# Allegro board GatawayAndControl.brd
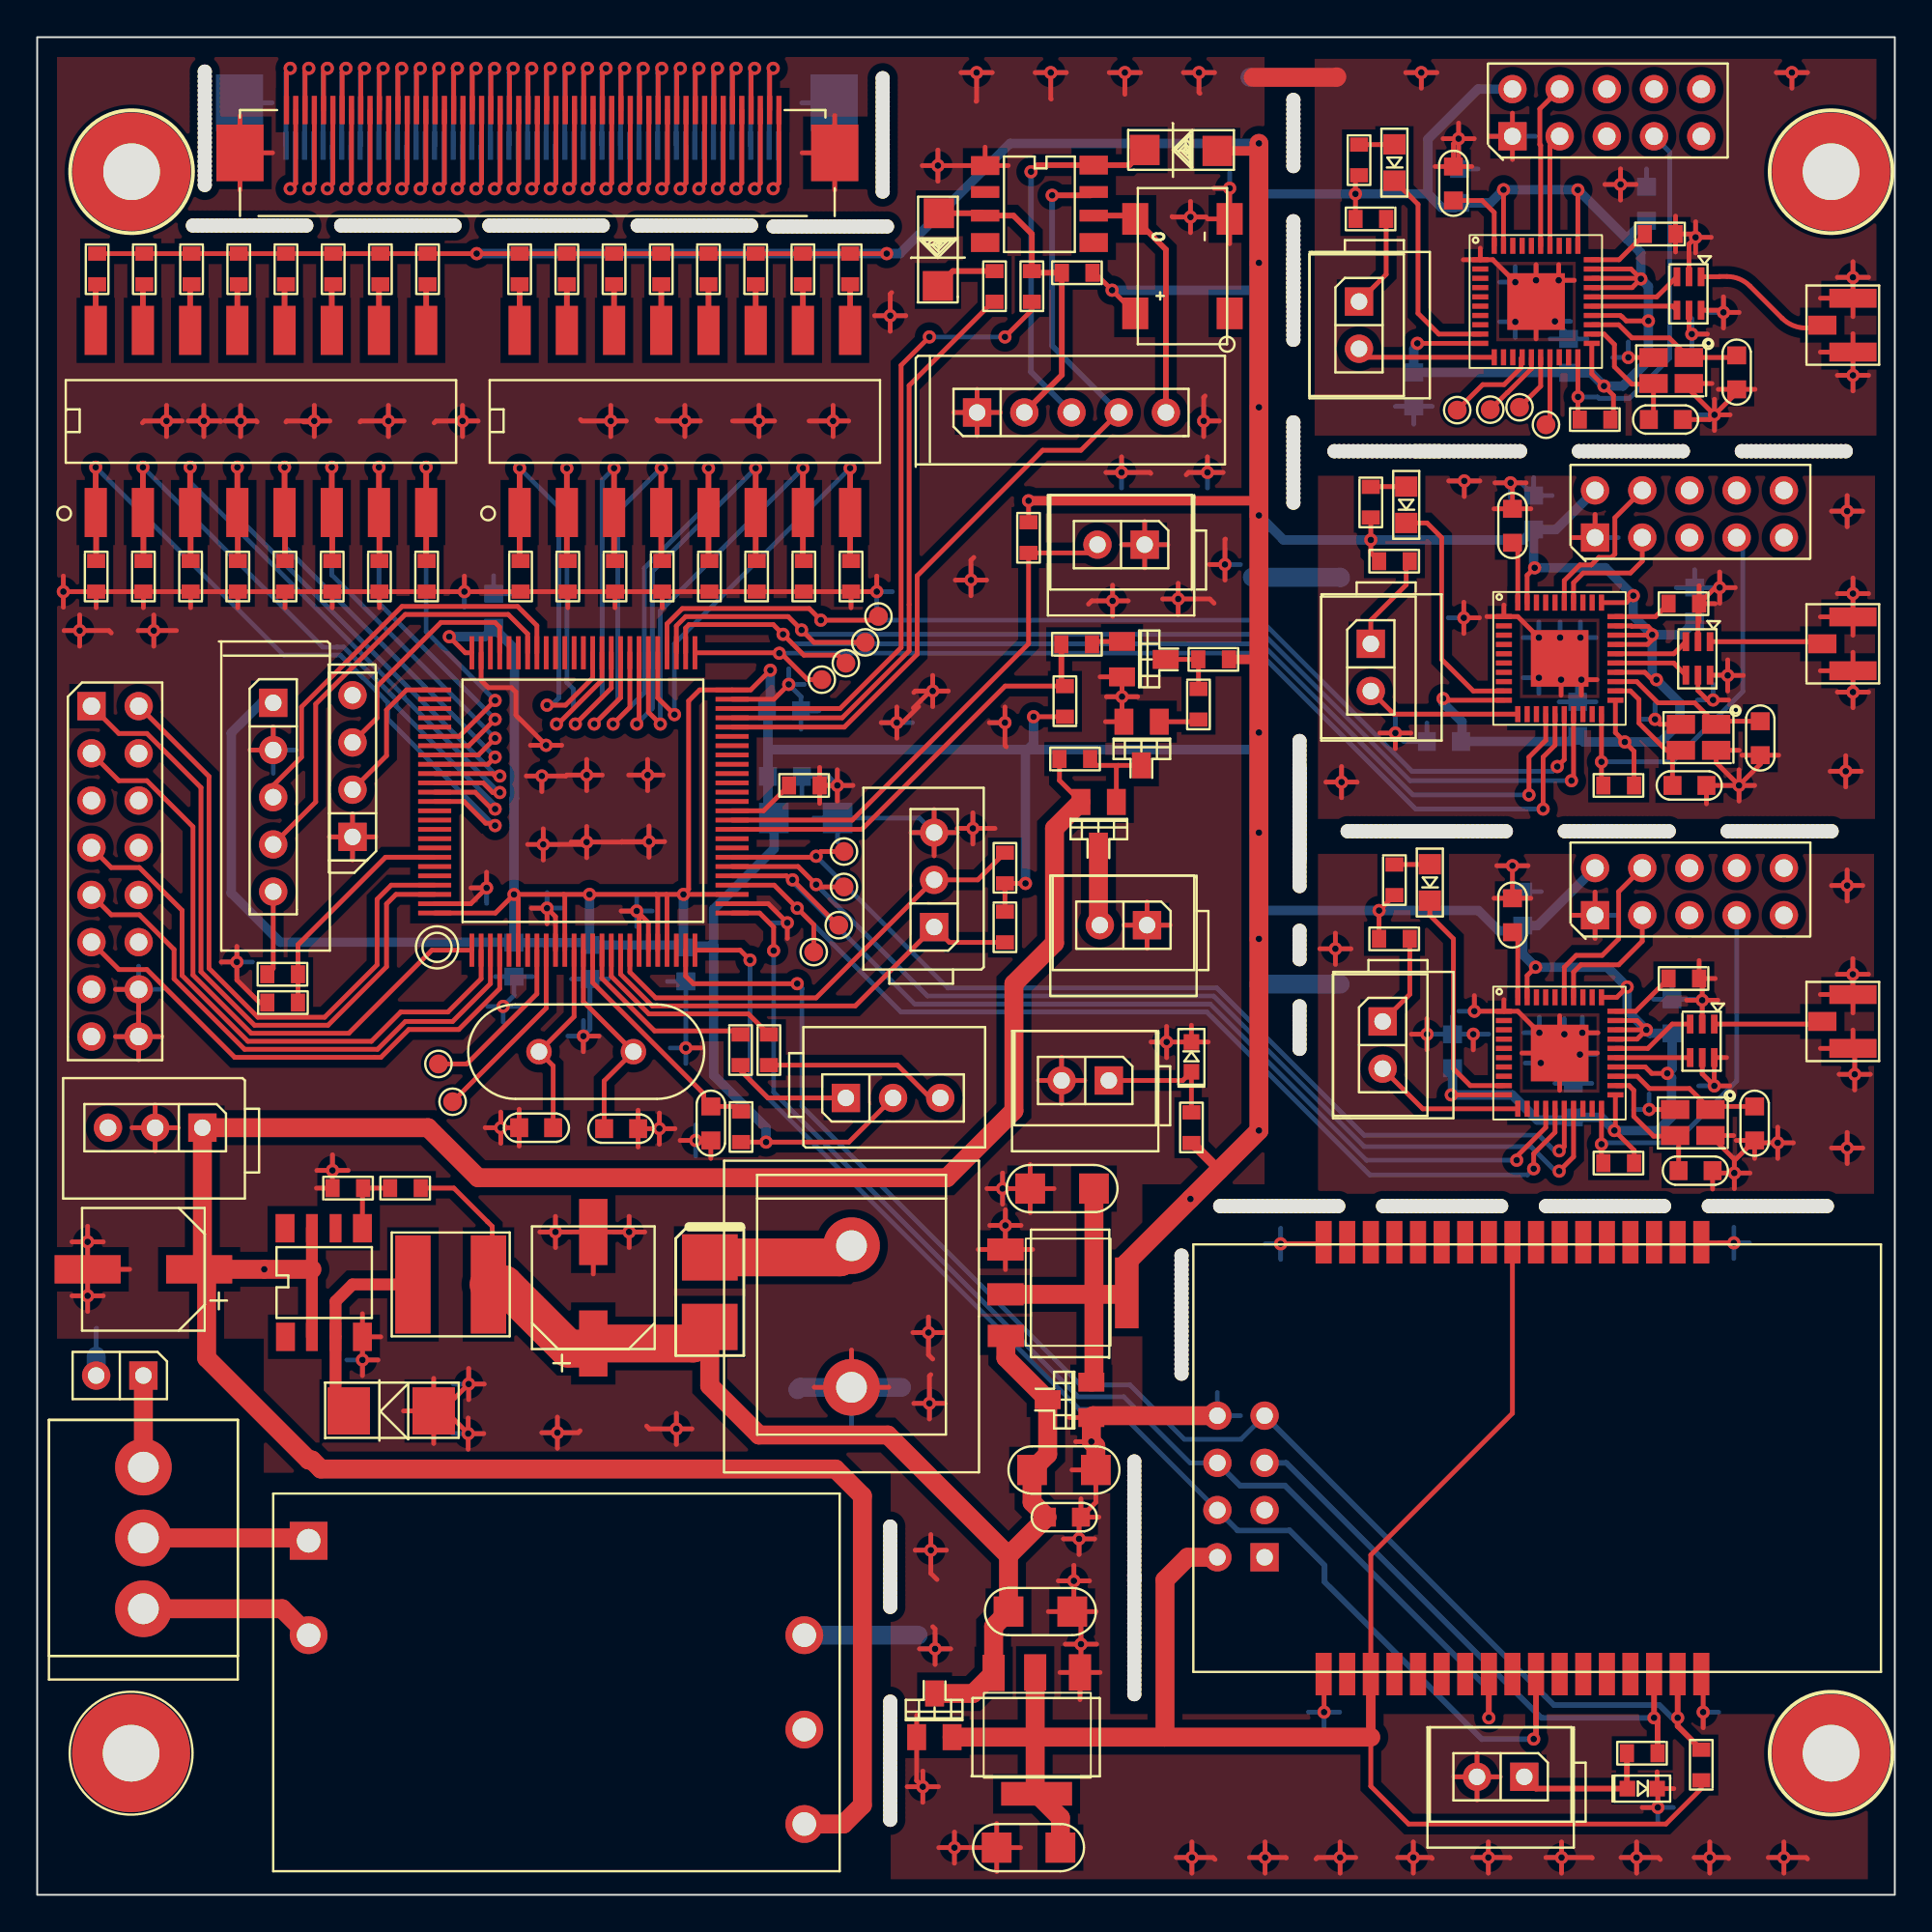
[diagram p0: board, top side]
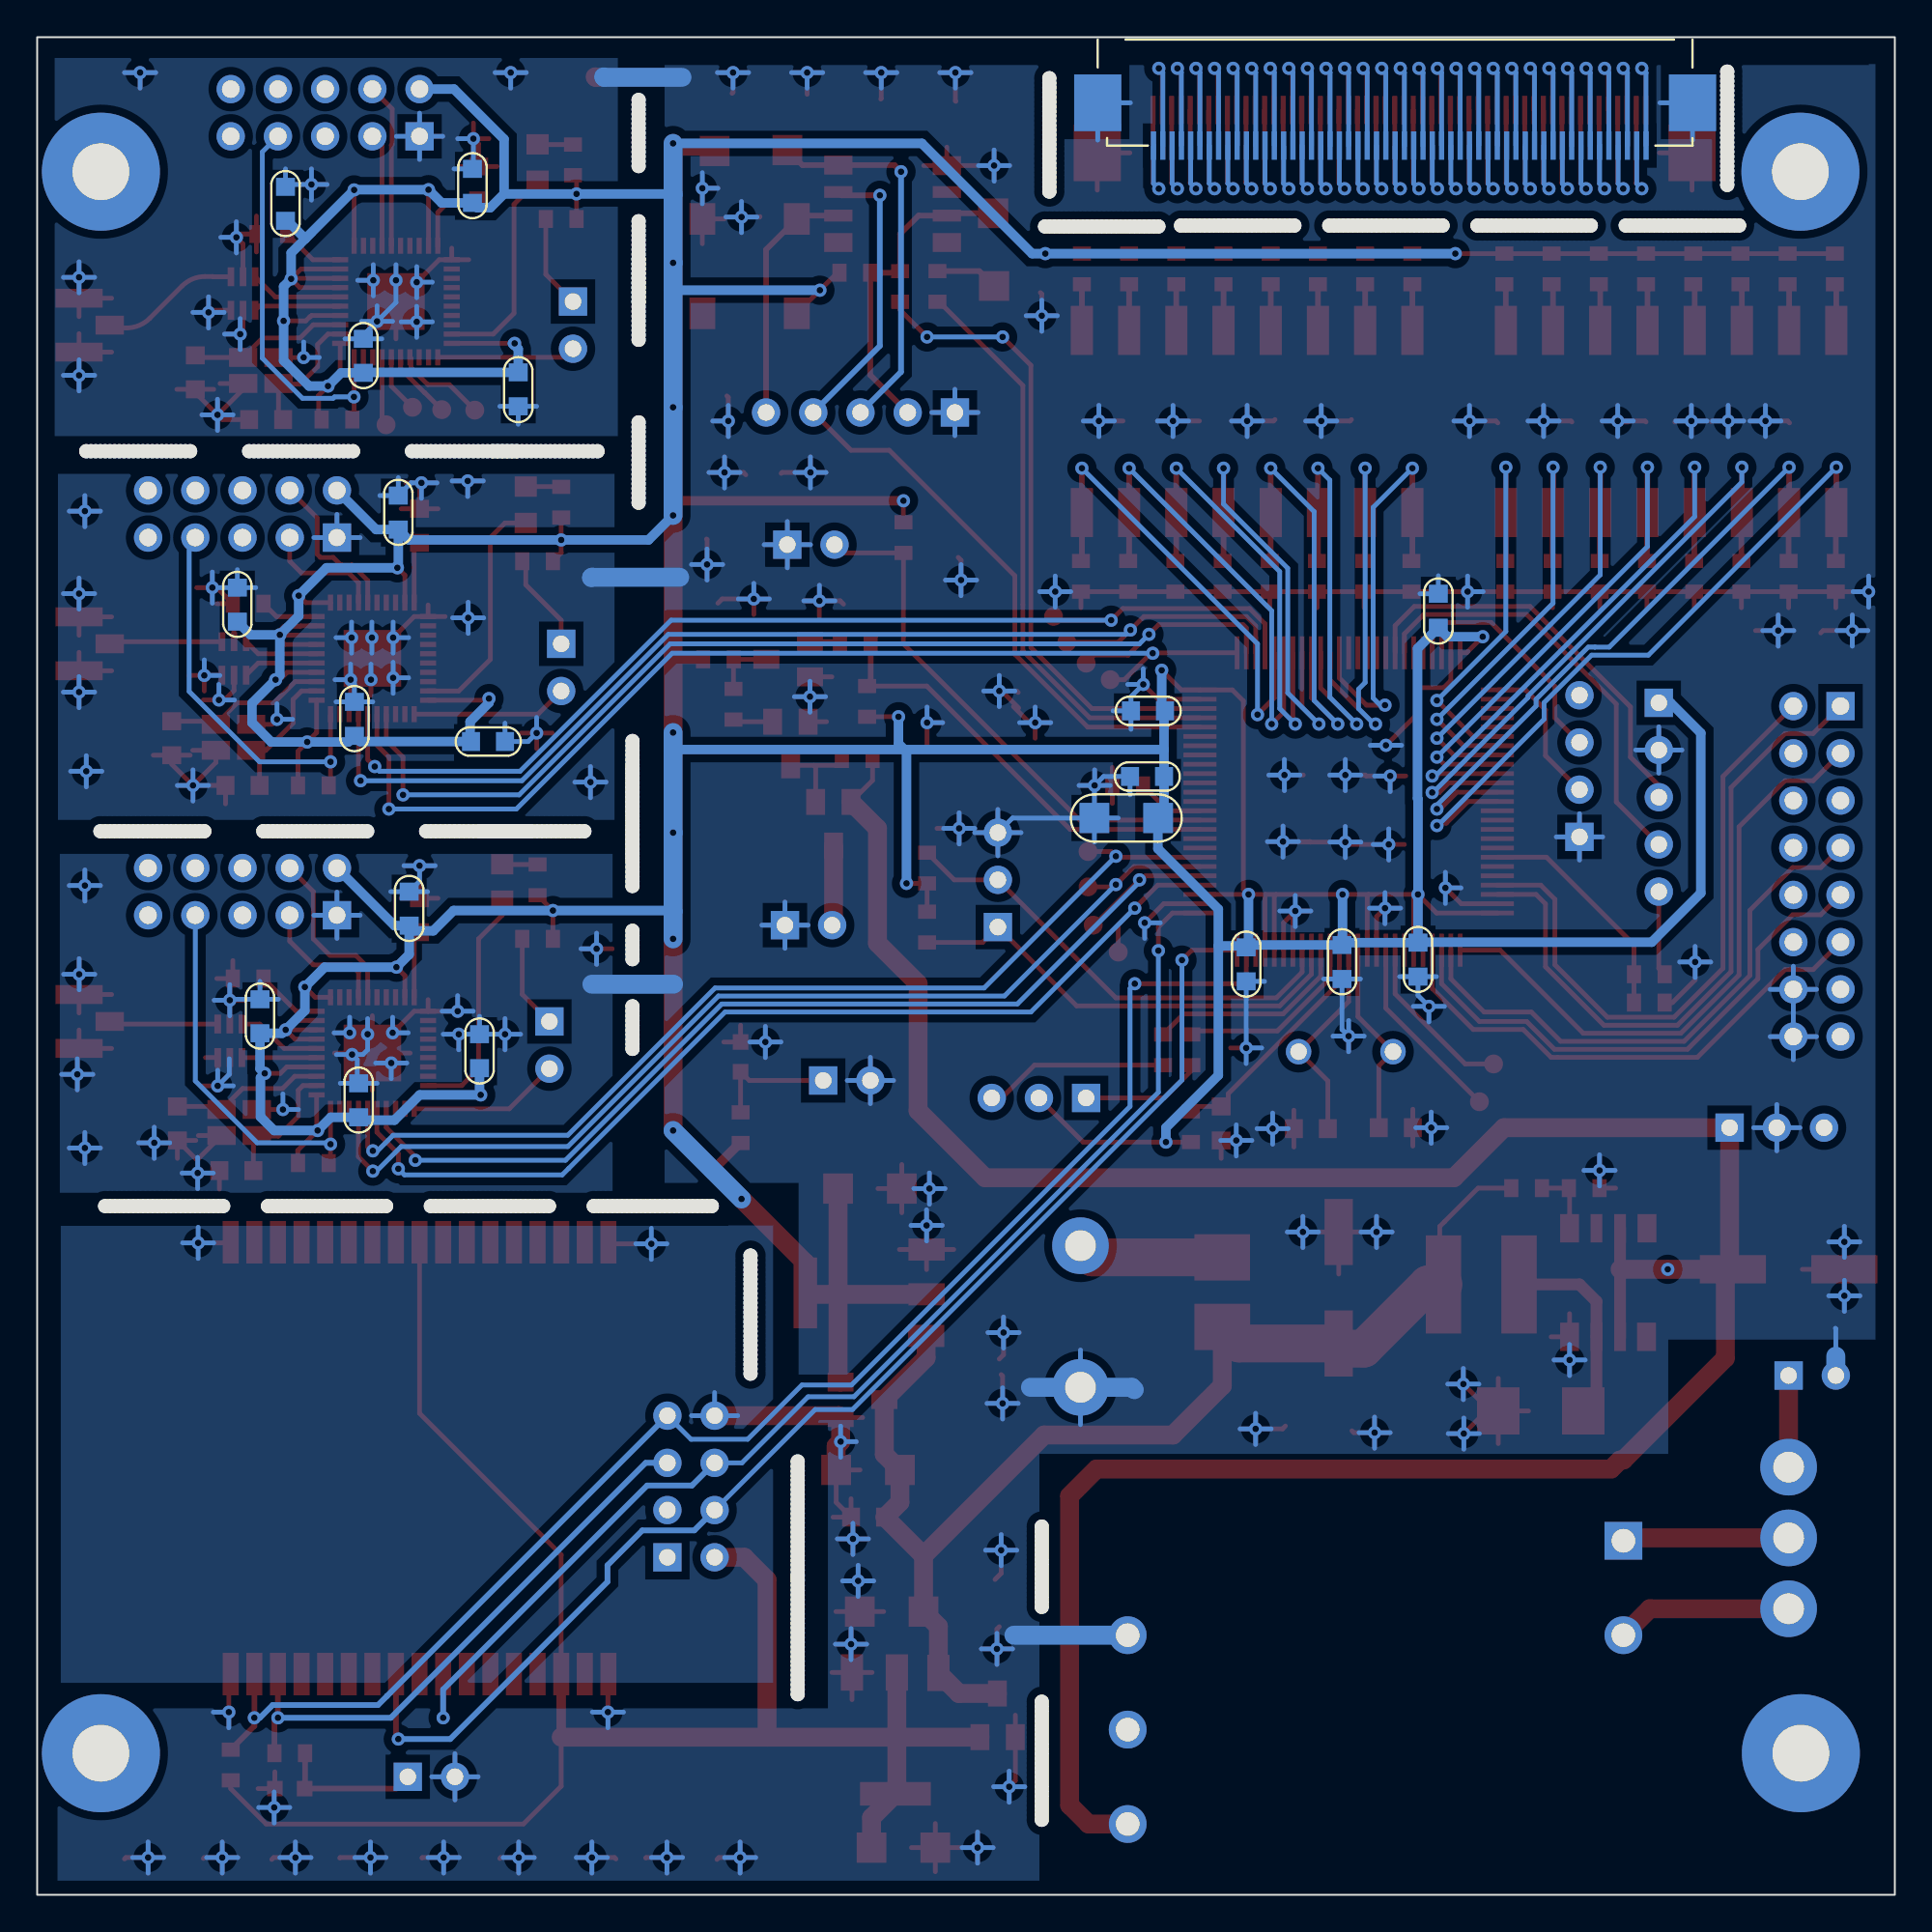
[diagram p1: board, bottom side, seen from below]

Outline 99.95 x 99.95 mm; copper layers: TOP, BOTTOM. Coordinates in mm from the lower left corner of the outline.
Outline path: rectangle 0,0 99.95,99.95

## Placement (name value [footprint] x y rotation side)
AC_220V  AC_220V  [HEADER3-150MIL]  5.71 19.2 180 top
ANT201  -  [IPX]  94.61 46.99 90 top
ANT301  -  [IPX]  94.61 67.31 90 top
ANT401  -  [IPX]  94.61 84.45 90 top
BM200  -  [2450BM]  89.59 45.95 0 top
BM300  -  [2450BM]  89.36 66.52 0 top
BM400  -  [2450BM]  88.87 86.16 0 top
C100  0.1U  [C0603]  36.25 41.5 270 top
C101  0.1U  [C0603]  25.65 50.32 270 bottom
C102  0.1U  [C0603]  29.74 50.19 270 bottom
C103  0.1U  [C0603]  40.23 60.17 0 bottom
C104  0.1U  [C0603]  40.18 63.7 0 bottom
C105  0.1U  [C0603]  24.56 69.09 90 bottom
C106  10uF  [C1206]  41.35 57.94 270 bottom
C107  0.1U  [C0603]  34.9 50.06 270 bottom
C108  15pF  [C0603]  26.85 41.27 180 top
C109  15pF  [C0603]  31.42 41.22 0 top
C200  1uf  [C0603]  79.38 52.7 270 top
C202  0.1uf  [C0603]  76.15 45.39 270 bottom
C203  0.1uf  [C0603]  82.65 42.75 270 bottom
C204  0.1uf  [C0603]  87.96 47.27 270 bottom
C205  0.1uf  [C0603]  79.93 53.06 270 bottom
C208  20pF  [C0603]  89.23 38.96 0 top
C209  20pF  [C0603]  92.41 41.5 270 top
C300  1uf  [C0603]  79.38 73.66 270 top
C301  0.1uf  [C0603]  75.69 62.05 0 bottom
C303  0.1uf  [C0603]  82.88 63.27 270 bottom
C304  0.1uf  [C0603]  89.18 69.42 270 bottom
C305  0.1uf  [C0603]  80.52 74.37 270 bottom
C308  20pF  [C0603]  88.9 59.69 0 top
C309  20pF  [C0603]  92.71 62.23 270 top
C400  1uf  [C0603]  76.2 92.08 270 top
C401  0.1uf  [C0603]  74.07 81 90 bottom
C402  0.1uf  [C0603]  82.4 82.8 270 bottom
C403  0.1uf  [C0603]  86.59 90.98 270 bottom
C404  0.1uf  [C0603]  76.53 91.95 270 bottom
C408  20pF  [C0603]  87.63 79.38 0 top
C409  20pF  [C0603]  91.44 81.92 270 top
C500  10uF  [C1206]  53.98 15.24 90 top
C501  10uF  [C1206]  53.34 2.54 270 top
C1000  220uf/25v  [CAPAE660X570L]  5.71 33.66 180 top
C1001  100uf/ECAP6  [CAPAE660X570L]  29.92 32.66 90 top
C1002  0.1uf  [C0603]  55.24 20.32 180 top
C1003  10uF  [C1206]  55.24 22.86 90 top
C1004  10uF  [C1206]  55.14 38 270 top
C1005  CAP_1  [HEADER2]  5.71 27.94 180 top
D900  DIODE  [1N4148]  59.99 93.85 90 top
D901  DIODE  [1N4148]  48.49 86.97 180 top
D1000  1N5819  [B130L]  19.05 26.04 0 top
D1001  LED  [LED0603]  86.36 5.71 270 top
D1002  LED  [LED0603]  62.1 45.09 0 top
DC_12V  DC_12V  [HEADER3]  5.08 41.27 180 top
DOWN200  DOWN  [HEADER10]  83.82 52.7 0 top
DOWN300  DOWN  [HEADER10]  83.82 73.03 0 top
DOWN400  DOWN  [HEADER10]  79.38 94.61 0 top
H600  LED_POWER  [HEADER2-300MIL]  43.81 31.11 0 top
H601  LED_12PORT  [HEADER8X2]  2.92 63.96 270 top
H700  HEADER  [HEADER2]  59.72 52.17 180 top
H701  HEADER  [HEADER2]  59.59 72.64 180 top
H900  DOWNLOAD  [HEADER5]  50.57 79.76 0 top
H*  -  [unnamed#2]  96.52 7.62 0 top
H*#2  -  [unnamed#2]  5.08 92.71 0 top
H*#3  -  [unnamed#2]  5.05 7.62 0 top
ID800  ID1  [SW-8PIN]  12.04 79.27 90 top
ID801  ID2  [SW-8PIN]  34.85 79.27 90 top
J600  JUMP  [CAP-B]  36.2 32.38 90 top
J601  FPC54  [FH12A-54S-0_5FCC]  13.41 93.73 0 top
J602  FPC54  [FH12A-54S-0_5FCC]  13.39 96.42 0 bottom
J603  TESTPONT-L  [TESTSMD]  76.4 79.88 0 top
J604  TESTPONT-L  [TESTSMD]  78.18 79.91 0 top
J605  TESTPONT-L  [TESTSMD]  79.76 80.04 0 top
J606  TESTPONT-L  [TESTSMD]  81.18 79.1 0 top
J607  TESTPONT-L  [TESTSMD]  43.13 52.17 0 top
J608  TESTPONT-L  [TESTSMD]  41.78 50.72 0 top
J609  TESTPONT-L  [TESTSMD]  43.41 56.13 0 top
J610  TESTPONT-L  [TESTSMD]  43.41 54.23 0 top
J611  TESTPONT-L  [TESTSMD]  42.21 65.38 0 top
J612  TESTPONT-L  [TESTSMD]  45.26 68.78 0 top
J613  TESTPONT-L  [TESTSMD]  43.51 66.27 0 top
J614  TESTPONT-L  [TESTSMD]  44.55 67.39 0 top
L1000  22UH/SMD  [CDRH4D18]  22.25 32.84 270 top
LED100  LED  [HEADER3]  47.32 42.88 0 top
LED200  LED  [LED_SMD]  74.93 53.34 180 top
LED300  LED  [LED_SMD]  73.66 73.66 180 top
LED400  LED  [LED_SMD]  73.03 92.08 180 top
NOREF  -  [unnamed]  61.57 34.39 270 top
NOREF#2  -  [unnamed]  45.49 97.23 270 top
NOREF#3  -  [unnamed]  67.59 87.76 90 top
NOREF#4  -  [unnamed]  37.13 89.81 180 top
NOREF#5  -  [unnamed]  72.59 77.67 0 top
NOREF#6  -  [unnamed]  67.92 60.55 270 top
NOREF#7  -  [unnamed]  75.84 57.23 0 top
NOREF#8  -  [unnamed]  76.73 37.06 180 top
NOREF#9  -  [unnamed]  67.59 76.43 90 top
NOREF#10  -  [unnamed]  85.5 77.67 0 top
NOREF#11  -  [unnamed]  78.26 77.67 0 top
NOREF#12  -  [unnamed]  72.8 57.23 0 top
NOREF#13  -  [unnamed]  83.97 37.06 180 top
NOREF#14  -  [unnamed]  70.31 77.67 0 top
NOREF#15  -  [unnamed]  67.59 94.79 90 top
NOREF#16  -  [unnamed]  67.92 47.04 270 top
NOREF#17  -  [unnamed]  9.14 89.81 180 top
NOREF#18  -  [unnamed]  19.91 89.81 180 top
NOREF#19  -  [unnamed]  69.24 37.06 180 top
NOREF#20  -  [unnamed]  67.59 88.27 90 top
NOREF#21  -  [unnamed]  9.02 96.06 270 top
NOREF#22  -  [unnamed]  61.57 34.14 270 top
NOREF#23  -  [unnamed]  27.38 89.81 180 top
NOREF#24  -  [unnamed]  67.59 87 90 top
NOREF#25  -  [unnamed]  67.92 54.53 270 top
NOREF#26  -  [unnamed]  59.03 17.98 270 top
NOREF#27  -  [unnamed]  95.02 57.23 0 top
NOREF#28  -  [unnamed]  74.07 57.23 0 top
NOREF#29  -  [unnamed]  68.22 37.06 180 top
NOREF#30  -  [unnamed]  59.03 20.27 270 top
NOREF#31  -  [unnamed]  61.57 31.34 270 top
NOREF#32  -  [unnamed]  91.97 37.06 180 top
NOREF#33  -  [unnamed]  85.75 77.67 0 top
NOREF#34  -  [unnamed]  25.1 89.81 180 top
NOREF#35  -  [unnamed]  43.69 89.76 180 top
NOREF#36  -  [unnamed]  19.41 89.81 180 top
NOREF#37  -  [unnamed]  35.1 89.81 180 top
NOREF#38  -  [unnamed]  61.57 31.85 270 top
NOREF#39  -  [unnamed]  86 57.23 0 top
NOREF#40  -  [unnamed]  59.03 19.25 270 top
NOREF#41  -  [unnamed]  59.03 13.08 270 top
NOREF#42  -  [unnamed]  88.04 77.67 0 top
NOREF#43  -  [unnamed]  9.02 96.32 270 top
NOREF#44  -  [unnamed]  75.13 77.67 0 top
NOREF#45  -  [unnamed]  67.59 96.06 90 top
NOREF#46  -  [unnamed]  67.59 85.72 90 top
NOREF#47  -  [unnamed]  59.03 19 270 top
NOREF#48  -  [unnamed]  74.96 77.67 0 top
NOREF#49  -  [unnamed]  67.92 56.57 270 top
NOREF#50  -  [unnamed]  24.84 89.81 180 top
NOREF#51  -  [unnamed]  45.9 5.56 90 top
NOREF#52  -  [unnamed]  76.48 57.23 0 top
NOREF#53  -  [unnamed]  35.61 89.81 180 top
NOREF#54  -  [unnamed]  67.59 95.3 90 top
NOREF#55  -  [unnamed]  13.46 89.81 180 top
NOREF#56  -  [unnamed]  93.75 37.06 180 top
NOREF#57  -  [unnamed]  45.49 92.91 270 top
NOREF#58  -  [unnamed]  19.66 89.81 180 top
NOREF#59  -  [unnamed]  25.86 89.81 180 top
NOREF#60  -  [unnamed]  86.51 57.23 0 top
NOREF#61  -  [unnamed]  9.65 89.81 180 top
NOREF#62  -  [unnamed]  90.2 37.06 180 top
NOREF#63  -  [unnamed]  67.92 56.49 270 top
NOREF#64  -  [unnamed]  77.75 37.06 180 top
NOREF#65  -  [unnamed]  67.92 58.27 270 top
NOREF#66  -  [unnamed]  78.77 77.67 0 top
NOREF#67  -  [unnamed]  86 37.06 180 top
NOREF#68  -  [unnamed]  69.75 37.06 180 top
NOREF#69  -  [unnamed]  67.59 93.52 90 top
NOREF#70  -  [unnamed]  86.51 77.67 0 top
NOREF#71  -  [unnamed]  9.02 93.52 270 top
NOREF#72  -  [unnamed]  45.9 7.59 90 top
NOREF#73  -  [unnamed]  45.49 97.74 270 top
NOREF#74  -  [unnamed]  73.18 37.06 180 top
NOREF#75  -  [unnamed]  27.89 89.81 180 top
NOREF#76  -  [unnamed]  67.59 96.32 90 top
NOREF#77  -  [unnamed]  92.99 57.23 0 top
NOREF#78  -  [unnamed]  94.01 57.23 0 top
NOREF#79  -  [unnamed]  92.74 37.06 180 top
NOREF#80  -  [unnamed]  95.78 37.06 180 top
NOREF#81  -  [unnamed]  45.49 94.95 270 top
NOREF#82  -  [unnamed]  67.59 77.95 90 top
NOREF#83  -  [unnamed]  63.65 37.06 180 top
NOREF#84  -  [unnamed]  45.9 8.36 90 top
NOREF#85  -  [unnamed]  67.59 75.92 90 top
NOREF#86  -  [unnamed]  43.43 89.76 180 top
NOREF#87  -  [unnamed]  67.92 50.85 270 top
NOREF#88  -  [unnamed]  29.67 89.81 180 top
NOREF#89  -  [unnamed]  10.67 89.81 180 top
NOREF#90  -  [unnamed]  59.03 22.05 270 top
NOREF#91  -  [unnamed]  74.83 57.23 0 top
NOREF#92  -  [unnamed]  67.59 89.28 90 top
NOREF#93  -  [unnamed]  45.49 95.45 270 top
NOREF#94  -  [unnamed]  93.24 37.06 180 top
NOREF#95  -  [unnamed]  67.92 51.87 270 top
NOREF#96  -  [unnamed]  73.05 57.23 0 top
NOREF#97  -  [unnamed]  35.36 89.81 180 top
NOREF#98  -  [unnamed]  85.24 37.06 180 top
NOREF#99  -  [unnamed]  22.45 89.81 180 top
NOREF#100  -  [unnamed]  79.27 77.67 0 top
NOREF#101  -  [unnamed]  83.46 57.23 0 top
NOREF#102  -  [unnamed]  59.03 18.75 270 top
NOREF#103  -  [unnamed]  67.92 56.24 270 top
NOREF#104  -  [unnamed]  45.9 4.8 90 top
NOREF#105  -  [unnamed]  27.13 89.81 180 top
NOREF#106  -  [unnamed]  87.27 57.23 0 top
NOREF#107  -  [unnamed]  45.49 96.22 270 top
NOREF#108  -  [unnamed]  67.59 93.78 90 top
NOREF#109  -  [unnamed]  45.9 7.85 90 top
NOREF#110  -  [unnamed]  67.59 87.22 90 top
NOREF#111  -  [unnamed]  67.92 45.77 270 top
NOREF#112  -  [unnamed]  82.96 77.67 0 top
NOREF#113  -  [unnamed]  93.5 57.23 0 top
NOREF#114  -  [unnamed]  77.5 77.67 0 top
NOREF#115  -  [unnamed]  42.42 89.76 180 top
NOREF#116  -  [unnamed]  67.92 50.34 270 top
NOREF#117  -  [unnamed]  74.37 77.67 0 top
NOREF#118  -  [unnamed]  67.92 56.74 270 top
NOREF#119  -  [unnamed]  45.49 94.18 270 top
NOREF#120  -  [unnamed]  9.02 97.33 270 top
NOREF#121  -  [unnamed]  67.92 60.3 270 top
NOREF#122  -  [unnamed]  59.03 14.35 270 top
NOREF#123  -  [unnamed]  59.03 19.51 270 top
NOREF#124  -  [unnamed]  20.42 89.81 180 top
NOREF#125  -  [unnamed]  77.75 77.67 0 top
NOREF#126  -  [unnamed]  82.96 37.06 180 top
NOREF#127  -  [unnamed]  70.05 77.67 0 top
NOREF#128  -  [unnamed]  45.9 18.03 90 top
NOREF#129  -  [unnamed]  30.43 89.81 180 top
NOREF#130  -  [unnamed]  45.47 89.76 180 top
NOREF#131  -  [unnamed]  92.99 37.06 180 top
NOREF#132  -  [unnamed]  73.61 77.67 0 top
NOREF#133  -  [unnamed]  59.03 18.24 270 top
NOREF#134  -  [unnamed]  67.59 78.97 90 top
NOREF#135  -  [unnamed]  76.73 77.67 0 top
NOREF#136  -  [unnamed]  95.53 37.06 180 top
NOREF#137  -  [unnamed]  67.59 88.52 90 top
NOREF#138  -  [unnamed]  75.46 77.67 0 top
NOREF#139  -  [unnamed]  67.92 45.52 270 top
NOREF#140  -  [unnamed]  92.23 57.23 0 top
NOREF#141  -  [unnamed]  77.5 37.06 180 top
NOREF#142  -  [unnamed]  67.59 94.54 90 top
NOREF#143  -  [unnamed]  59.03 15.62 270 top
NOREF#144  -  [unnamed]  45.9 10.39 90 top
NOREF#145  -  [unnamed]  84.99 57.23 0 top
NOREF#146  -  [unnamed]  67.92 47.55 270 top
NOREF#147  -  [unnamed]  9.02 92.25 270 top
NOREF#148  -  [unnamed]  20.17 89.81 180 top
NOREF#149  -  [unnamed]  59.03 11.05 270 top
NOREF#150  -  [unnamed]  92.48 57.23 0 top
NOREF#151  -  [unnamed]  45.49 92.41 270 top
NOREF#152  -  [unnamed]  71.07 77.67 0 top
NOREF#153  -  [unnamed]  78.51 57.23 0 top
NOREF#154  -  [unnamed]  42.67 89.76 180 top
NOREF#155  -  [unnamed]  9.4 89.81 180 top
NOREF#156  -  [unnamed]  45.9 19.81 90 top
NOREF#157  -  [unnamed]  13.97 89.81 180 top
NOREF#158  -  [unnamed]  84.23 37.06 180 top
NOREF#159  -  [unnamed]  40.13 89.76 180 top
NOREF#160  -  [unnamed]  65.68 37.06 180 top
NOREF#161  -  [unnamed]  67.59 75.16 90 top
NOREF#162  -  [unnamed]  41.91 89.76 180 top
NOREF#163  -  [unnamed]  16.36 89.81 180 top
NOREF#164  -  [unnamed]  38.15 89.81 180 top
NOREF#165  -  [unnamed]  45.9 4.29 90 top
NOREF#166  -  [unnamed]  75.21 57.23 0 top
NOREF#167  -  [unnamed]  75.34 57.23 0 top
NOREF#168  -  [unnamed]  61.57 30.33 270 top
NOREF#169  -  [unnamed]  74.45 57.23 0 top
NOREF#170  -  [unnamed]  76.23 77.67 0 top
NOREF#171  -  [unnamed]  59.03 16.97 270 top
NOREF#172  -  [unnamed]  72.09 77.67 0 top
NOREF#173  -  [unnamed]  91.97 77.67 0 top
NOREF#174  -  [unnamed]  44.7 89.76 180 top
NOREF#175  -  [unnamed]  77.24 37.06 180 top
NOREF#176  -  [unnamed]  67.59 90.04 90 top
NOREF#177  -  [unnamed]  97.05 77.67 0 top
NOREF#178  -  [unnamed]  9.02 95.81 270 top
NOREF#179  -  [unnamed]  34.34 89.81 180 top
NOREF#180  -  [unnamed]  67.92 57 270 top
NOREF#181  -  [unnamed]  74.12 77.67 0 top
NOREF#182  -  [unnamed]  9.02 96.57 270 top
NOREF#183  -  [unnamed]  68.73 37.06 180 top
NOREF#184  -  [unnamed]  87.53 57.23 0 top
NOREF#185  -  [unnamed]  67.92 47.29 270 top
NOREF#186  -  [unnamed]  71.02 57.23 0 top
NOREF#187  -  [unnamed]  67.59 85.95 90 top
NOREF#188  -  [unnamed]  86.77 57.23 0 top
NOREF#189  -  [unnamed]  67.92 61.32 270 top
NOREF#190  -  [unnamed]  45.21 89.76 180 top
NOREF#191  -  [unnamed]  34.85 89.81 180 top
NOREF#192  -  [unnamed]  61.57 31.6 270 top
NOREF#193  -  [unnamed]  73.43 57.23 0 top
NOREF#194  -  [unnamed]  67.92 54.28 270 top
NOREF#195  -  [unnamed]  45.9 17.02 90 top
NOREF#196  -  [unnamed]  32.82 89.81 180 top
NOREF#197  -  [unnamed]  45.9 6.83 90 top
NOREF#198  -  [unnamed]  9.02 93.01 270 top
NOREF#199  -  [unnamed]  73.43 37.06 180 top
NOREF#200  -  [unnamed]  91.21 57.23 0 top
NOREF#201  -  [unnamed]  76.48 37.06 180 top
NOREF#202  -  [unnamed]  45.9 16 90 top
NOREF#203  -  [unnamed]  87.78 57.23 0 top
NOREF#204  -  [unnamed]  91.97 57.23 0 top
NOREF#205  -  [unnamed]  74.7 37.06 180 top
NOREF#206  -  [unnamed]  67.59 79.22 90 top
NOREF#207  -  [unnamed]  26.87 89.81 180 top
NOREF#208  -  [unnamed]  67.92 54.79 270 top
NOREF#209  -  [unnamed]  67.59 96.57 90 top
NOREF#210  -  [unnamed]  66.7 37.06 180 top
NOREF#211  -  [unnamed]  85.5 57.23 0 top
NOREF#212  -  [unnamed]  8.38 89.81 180 top
NOREF#213  -  [unnamed]  74.45 37.06 180 top
NOREF#214  -  [unnamed]  83.72 37.06 180 top
NOREF#215  -  [unnamed]  18.39 89.81 180 top
NOREF#216  -  [unnamed]  92.48 77.67 0 top
NOREF#217  -  [unnamed]  25.6 89.81 180 top
NOREF#218  -  [unnamed]  67.59 87.73 90 top
NOREF#219  -  [unnamed]  41.66 89.76 180 top
NOREF#220  -  [unnamed]  22.2 89.81 180 top
NOREF#221  -  [unnamed]  84.73 57.23 0 top
NOREF#222  -  [unnamed]  67.59 85.19 90 top
NOREF#223  -  [unnamed]  45.49 95.96 270 top
NOREF#224  -  [unnamed]  45.9 16.76 90 top
NOREF#225  -  [unnamed]  59.03 16.64 270 top
NOREF#226  -  [unnamed]  67.92 58.01 270 top
NOREF#227  -  [unnamed]  78.77 37.06 180 top
NOREF#228  -  [unnamed]  59.03 11.56 270 top
NOREF#229  -  [unnamed]  67.72 37.06 180 top
NOREF#230  -  [unnamed]  67.92 60.12 270 top
NOREF#231  -  [unnamed]  67.92 57.07 270 top
NOREF#232  -  [unnamed]  20.68 89.81 180 top
NOREF#233  -  [unnamed]  67.59 95.81 90 top
NOREF#234  -  [unnamed]  92.23 77.67 0 top
NOREF#235  -  [unnamed]  70.56 77.67 0 top
NOREF#236  -  [unnamed]  61.57 31.09 270 top
NOREF#237  -  [unnamed]  77.75 57.23 0 top
NOREF#238  -  [unnamed]  72.03 57.23 0 top
NOREF#239  -  [unnamed]  75.72 37.06 180 top
NOREF#240  -  [unnamed]  83.21 77.67 0 top
NOREF#241  -  [unnamed]  93.5 77.67 0 top
NOREF#242  -  [unnamed]  45.49 93.42 270 top
NOREF#243  -  [unnamed]  94.77 57.23 0 top
NOREF#244  -  [unnamed]  45.9 8.61 90 top
NOREF#245  -  [unnamed]  67.92 58.52 270 top
NOREF#246  -  [unnamed]  33.07 89.81 180 top
NOREF#247  -  [unnamed]  88.54 77.67 0 top
NOREF#248  -  [unnamed]  87.78 77.67 0 top
NOREF#249  -  [unnamed]  67.21 37.06 180 top
NOREF#250  -  [unnamed]  84.99 37.06 180 top
NOREF#251  -  [unnamed]  67.59 86.46 90 top
NOREF#252  -  [unnamed]  9.02 94.79 270 top
NOREF#253  -  [unnamed]  91.47 57.23 0 top
NOREF#254  -  [unnamed]  67.59 77.19 90 top
NOREF#255  -  [unnamed]  67.92 58.09 270 top
NOREF#256  -  [unnamed]  74.45 77.67 0 top
NOREF#257  -  [unnamed]  75.21 37.06 180 top
NOREF#258  -  [unnamed]  28.91 89.81 180 top
NOREF#259  -  [unnamed]  59.03 19.76 270 top
NOREF#260  -  [unnamed]  86.26 77.67 0 top
NOREF#261  -  [unnamed]  79.02 77.67 0 top
NOREF#262  -  [unnamed]  90.7 37.06 180 top
NOREF#263  -  [unnamed]  74.63 77.67 0 top
NOREF#264  -  [unnamed]  94.01 37.06 180 top
NOREF#265  -  [unnamed]  67.59 86.23 90 top
NOREF#266  -  [unnamed]  96.04 77.67 0 top
NOREF#267  -  [unnamed]  85.75 57.23 0 top
NOREF#268  -  [unnamed]  45.9 19.3 90 top
NOREF#269  -  [unnamed]  70 37.06 180 top
NOREF#270  -  [unnamed]  36.37 89.81 180 top
NOREF#271  -  [unnamed]  86.26 37.06 180 top
NOREF#272  -  [unnamed]  59.03 10.79 270 top
NOREF#273  -  [unnamed]  79.78 77.67 0 top
NOREF#274  -  [unnamed]  72.92 37.06 180 top
NOREF#275  -  [unnamed]  71.58 77.67 0 top
NOREF#276  -  [unnamed]  72.42 37.06 180 top
NOREF#277  -  [unnamed]  67.59 77.44 90 top
NOREF#278  -  [unnamed]  59.03 13.84 270 top
NOREF#279  -  [unnamed]  84.23 77.67 0 top
NOREF#280  -  [unnamed]  9.02 97.08 270 top
NOREF#281  -  [unnamed]  61.57 32.87 270 top
NOREF#282  -  [unnamed]  59.03 13.34 270 top
NOREF#283  -  [unnamed]  95.28 77.67 0 top
NOREF#284  -  [unnamed]  67.92 46.53 270 top
NOREF#285  -  [unnamed]  21.69 89.81 180 top
NOREF#286  -  [unnamed]  83.72 57.23 0 top
NOREF#287  -  [unnamed]  75.46 57.23 0 top
NOREF#288  -  [unnamed]  26.37 89.81 180 top
NOREF#289  -  [unnamed]  16.61 89.81 180 top
NOREF#290  -  [unnamed]  73.3 57.23 0 top
NOREF#291  -  [unnamed]  76.99 37.06 180 top
NOREF#292  -  [unnamed]  9.02 96.82 270 top
NOREF#293  -  [unnamed]  21.95 89.81 180 top
NOREF#294  -  [unnamed]  95.02 37.06 180 top
NOREF#295  -  [unnamed]  71.83 77.67 0 top
NOREF#296  -  [unnamed]  75.39 77.67 0 top
NOREF#297  -  [unnamed]  12.19 89.81 180 top
NOREF#298  -  [unnamed]  67.92 60.38 270 top
NOREF#299  -  [unnamed]  86 77.67 0 top
NOREF#300  -  [unnamed]  67.92 61.82 270 top
NOREF#301  -  [unnamed]  67.92 58.85 270 top
NOREF#302  -  [unnamed]  41.15 89.76 180 top
NOREF#303  -  [unnamed]  94.01 77.67 0 top
NOREF#304  -  [unnamed]  67.92 58.6 270 top
NOREF#305  -  [unnamed]  40.39 89.76 180 top
NOREF#306  -  [unnamed]  67.92 59.54 270 top
NOREF#307  -  [unnamed]  77.24 57.23 0 top
NOREF#308  -  [unnamed]  76.48 77.67 0 top
NOREF#309  -  [unnamed]  21.18 89.81 180 top
NOREF#310  -  [unnamed]  45.9 15.75 90 top
NOREF#311  -  [unnamed]  11.43 89.81 180 top
NOREF#312  -  [unnamed]  89.94 37.06 180 top
NOREF#313  -  [unnamed]  67.59 89.03 90 top
NOREF#314  -  [unnamed]  82.19 57.23 0 top
NOREF#315  -  [unnamed]  9.02 95.55 270 top
NOREF#316  -  [unnamed]  75.72 77.67 0 top
NOREF#317  -  [unnamed]  59.03 15.37 270 top
NOREF#318  -  [unnamed]  67.59 89.53 90 top
NOREF#319  -  [unnamed]  18.9 89.81 180 top
NOREF#320  -  [unnamed]  67.59 74.9 90 top
NOREF#321  -  [unnamed]  67.59 75.67 90 top
NOREF#322  -  [unnamed]  78.77 57.23 0 top
NOREF#323  -  [unnamed]  96.55 57.23 0 top
NOREF#324  -  [unnamed]  34.09 89.81 180 top
NOREF#325  -  [unnamed]  67.59 85.98 90 top
NOREF#326  -  [unnamed]  93.75 77.67 0 top
NOREF#327  -  [unnamed]  75.46 37.06 180 top
NOREF#328  -  [unnamed]  82.96 57.23 0 top
NOREF#329  -  [unnamed]  61.57 28.3 270 top
NOREF#330  -  [unnamed]  28.4 89.81 180 top
NOREF#331  -  [unnamed]  17.88 89.81 180 top
NOREF#332  -  [unnamed]  45.9 16.26 90 top
NOREF#333  -  [unnamed]  45.49 93.93 270 top
NOREF#334  -  [unnamed]  79.02 57.23 0 top
NOREF#335  -  [unnamed]  73.1 77.67 0 top
NOREF#336  -  [unnamed]  70.51 57.23 0 top
NOREF#337  -  [unnamed]  59.03 12.32 270 top
NOREF#338  -  [unnamed]  96.29 37.06 180 top
NOREF#339  -  [unnamed]  37.9 89.81 180 top
NOREF#340  -  [unnamed]  59.03 17.14 270 top
NOREF#341  -  [unnamed]  61.57 29.82 270 top
NOREF#342  -  [unnamed]  73.56 57.23 0 top
NOREF#343  -  [unnamed]  45.72 89.76 180 top
NOREF#344  -  [unnamed]  43.94 89.76 180 top
NOREF#345  -  [unnamed]  61.57 32.11 270 top
NOREF#346  -  [unnamed]  76.99 57.23 0 top
NOREF#347  -  [unnamed]  82.19 37.06 180 top
NOREF#348  -  [unnamed]  67.92 62.08 270 top
NOREF#349  -  [unnamed]  67.92 57.33 270 top
NOREF#350  -  [unnamed]  71.78 57.23 0 top
NOREF#351  -  [unnamed]  45.9 5.05 90 top
NOREF#352  -  [unnamed]  78.51 37.06 180 top
NOREF#353  -  [unnamed]  67.92 55.73 270 top
NOREF#354  -  [unnamed]  28.14 89.81 180 top
NOREF#355  -  [unnamed]  67.59 86.21 90 top
NOREF#356  -  [unnamed]  59.03 15.88 270 top
NOREF#357  -  [unnamed]  69.49 37.06 180 top
NOREF#358  -  [unnamed]  67.92 47.8 270 top
NOREF#359  -  [unnamed]  82.7 37.06 180 top
NOREF#360  -  [unnamed]  96.55 77.67 0 top
NOREF#361  -  [unnamed]  61.57 30.07 270 top
NOREF#362  -  [unnamed]  84.48 37.06 180 top
NOREF#363  -  [unnamed]  67.92 57.51 270 top
NOREF#364  -  [unnamed]  67.92 46.79 270 top
NOREF#365  -  [unnamed]  25.35 89.81 180 top
NOREF#366  -  [unnamed]  11.94 89.81 180 top
NOREF#367  -  [unnamed]  97.31 77.67 0 top
NOREF#368  -  [unnamed]  61.57 32.61 270 top
NOREF#369  -  [unnamed]  45.9 7.34 90 top
NOREF#370  -  [unnamed]  12.7 89.81 180 top
NOREF#371  -  [unnamed]  84.73 37.06 180 top
NOREF#372  -  [unnamed]  42.93 89.76 180 top
NOREF#373  -  [unnamed]  75.21 77.67 0 top
NOREF#374  -  [unnamed]  67.92 58.78 270 top
NOREF#375  -  [unnamed]  45.49 96.98 270 top
NOREF#376  -  [unnamed]  95.28 57.23 0 top
NOREF#377  -  [unnamed]  72.54 57.23 0 top
NOREF#378  -  [unnamed]  78.51 77.67 0 top
NOREF#379  -  [unnamed]  73.94 57.23 0 top
NOREF#380  -  [unnamed]  21.44 89.81 180 top
NOREF#381  -  [unnamed]  67.59 84.18 90 top
NOREF#382  -  [unnamed]  65.94 37.06 180 top
NOREF#383  -  [unnamed]  67.92 51.36 270 top
NOREF#384  -  [unnamed]  92.74 77.67 0 top
NOREF#385  -  [unnamed]  45.49 96.72 270 top
NOREF#386  -  [unnamed]  66.95 37.06 180 top
NOREF#387  -  [unnamed]  67.59 87.99 90 top
NOREF#388  -  [unnamed]  83.97 77.67 0 top
NOREF#389  -  [unnamed]  59.03 23.32 270 top
NOREF#390  -  [unnamed]  45.49 92.15 270 top
NOREF#391  -  [unnamed]  67.92 59.61 270 top
NOREF#392  -  [unnamed]  61.57 33.63 270 top
NOREF#393  -  [unnamed]  67.59 78.46 90 top
NOREF#394  -  [unnamed]  59.03 20.52 270 top
NOREF#395  -  [unnamed]  67.92 56.06 270 top
NOREF#396  -  [unnamed]  9.02 94.28 270 top
NOREF#397  -  [unnamed]  93.5 37.06 180 top
NOREF#398  -  [unnamed]  37.64 89.81 180 top
NOREF#399  -  [unnamed]  59.03 16.38 270 top
NOREF#400  -  [unnamed]  61.57 30.84 270 top
NOREF#401  -  [unnamed]  45.9 8.1 90 top
NOREF#402  -  [unnamed]  45.9 19.05 90 top
NOREF#403  -  [unnamed]  59.03 17.22 270 top
NOREF#404  -  [unnamed]  72.34 77.67 0 top
NOREF#405  -  [unnamed]  13.21 89.81 180 top
NOREF#406  -  [unnamed]  81.69 37.06 180 top
NOREF#407  -  [unnamed]  91.72 57.23 0 top
NOREF#408  -  [unnamed]  86.77 77.67 0 top
NOREF#409  -  [unnamed]  87.02 37.06 180 top
NOREF#410  -  [unnamed]  45.9 4.04 90 top
NOREF#411  -  [unnamed]  71.53 57.23 0 top
NOREF#412  -  [unnamed]  95.28 37.06 180 top
NOREF#413  -  [unnamed]  84.48 57.23 0 top
NOREF#414  -  [unnamed]  90.96 57.23 0 top
NOREF#415  -  [unnamed]  45.9 9.12 90 top
NOREF#416  -  [unnamed]  78.26 37.06 180 top
NOREF#417  -  [unnamed]  61.57 28.8 270 top
NOREF#418  -  [unnamed]  9.91 89.81 180 top
NOREF#419  -  [unnamed]  74.7 77.67 0 top
NOREF#420  -  [unnamed]  67.59 87.48 90 top
NOREF#421  -  [unnamed]  9.02 95.3 270 top
NOREF#422  -  [unnamed]  87.02 57.23 0 top
NOREF#423  -  [unnamed]  82.7 57.23 0 top
NOREF#424  -  [unnamed]  35.86 89.81 180 top
NOREF#425  -  [unnamed]  64.16 37.06 180 top
NOREF#426  -  [unnamed]  67.59 85.45 90 top
NOREF#427  -  [unnamed]  59.03 14.61 270 top
NOREF#428  -  [unnamed]  26.62 89.81 180 top
NOREF#429  -  [unnamed]  85.24 57.23 0 top
NOREF#430  -  [unnamed]  61.57 33.38 270 top
NOREF#431  -  [unnamed]  45.9 9.63 90 top
NOREF#432  -  [unnamed]  70.76 57.23 0 top
NOREF#433  -  [unnamed]  96.8 77.67 0 top
NOREF#434  -  [unnamed]  67.59 95.55 90 top
NOREF#435  -  [unnamed]  67.97 37.06 180 top
NOREF#436  -  [unnamed]  12.95 89.81 180 top
NOREF#437  -  [unnamed]  67.92 55.04 270 top
NOREF#438  -  [unnamed]  28.65 89.81 180 top
NOREF#439  -  [unnamed]  64.92 37.06 180 top
NOREF#440  -  [unnamed]  24.59 89.81 180 top
NOREF#441  -  [unnamed]  84.99 77.67 0 top
NOREF#442  -  [unnamed]  59.03 21.54 270 top
NOREF#443  -  [unnamed]  67.59 76.17 90 top
NOREF#444  -  [unnamed]  67.59 86.72 90 top
NOREF#445  -  [unnamed]  66.45 37.06 180 top
NOREF#446  -  [unnamed]  8.64 89.81 180 top
NOREF#447  -  [unnamed]  67.92 59.11 270 top
NOREF#448  -  [unnamed]  73.94 37.06 180 top
NOREF#449  -  [unnamed]  26.11 89.81 180 top
NOREF#450  -  [unnamed]  45.9 9.37 90 top
NOREF#451  -  [unnamed]  76.99 77.67 0 top
NOREF#452  -  [unnamed]  83.46 77.67 0 top
NOREF#453  -  [unnamed]  81.94 37.06 180 top
NOREF#454  -  [unnamed]  9.02 92 270 top
NOREF#455  -  [unnamed]  94.26 77.67 0 top
NOREF#456  -  [unnamed]  85.24 77.67 0 top
NOREF#457  -  [unnamed]  92.99 77.67 0 top
NOREF#458  -  [unnamed]  61.57 29.31 270 top
NOREF#459  -  [unnamed]  81.43 37.06 180 top
NOREF#460  -  [unnamed]  17.37 89.81 180 top
NOREF#461  -  [unnamed]  67.59 89.79 90 top
NOREF#462  -  [unnamed]  95.02 77.67 0 top
NOREF#463  -  [unnamed]  67.46 37.06 180 top
NOREF#464  -  [unnamed]  78.26 57.23 0 top
NOREF#465  -  [unnamed]  74.7 57.23 0 top
NOREF#466  -  [unnamed]  67.59 86.74 90 top
NOREF#467  -  [unnamed]  72.29 57.23 0 top
NOREF#468  -  [unnamed]  95.53 77.67 0 top
NOREF#469  -  [unnamed]  67.92 61.57 270 top
NOREF#470  -  [unnamed]  67.59 86.49 90 top
NOREF#471  -  [unnamed]  92.23 37.06 180 top
NOREF#472  -  [unnamed]  45.49 94.69 270 top
NOREF#473  -  [unnamed]  67.92 59.79 270 top
NOREF#474  -  [unnamed]  86.26 57.23 0 top
NOREF#475  -  [unnamed]  74.88 77.67 0 top
NOREF#476  -  [unnamed]  36.12 89.81 180 top
NOREF#477  -  [unnamed]  59.03 12.83 270 top
NOREF#478  -  [unnamed]  59.03 11.81 270 top
NOREF#479  -  [unnamed]  45.9 7.09 90 top
NOREF#480  -  [unnamed]  67.92 46.02 270 top
NOREF#481  -  [unnamed]  67.92 56.82 270 top
NOREF#482  -  [unnamed]  37.39 89.81 180 top
NOREF#483  -  [unnamed]  83.72 77.67 0 top
NOREF#484  -  [unnamed]  94.51 77.67 0 top
NOREF#485  -  [unnamed]  33.32 89.81 180 top
NOREF#486  -  [unnamed]  17.12 89.81 180 top
NOREF#487  -  [unnamed]  45.9 6.58 90 top
NOREF#488  -  [unnamed]  86.51 37.06 180 top
NOREF#489  -  [unnamed]  75.97 77.67 0 top
NOREF#490  -  [unnamed]  67.59 83.92 90 top
NOREF#491  -  [unnamed]  44.2 89.76 180 top
NOREF#492  -  [unnamed]  10.41 89.81 180 top
NOREF#493  -  [unnamed]  18.14 89.81 180 top
NOREF#494  -  [unnamed]  67.92 59.28 270 top
NOREF#495  -  [unnamed]  61.57 32.36 270 top
NOREF#496  -  [unnamed]  77.5 57.23 0 top
NOREF#497  -  [unnamed]  33.83 89.81 180 top
NOREF#498  -  [unnamed]  88.29 77.67 0 top
NOREF#499  -  [unnamed]  90.45 37.06 180 top
NOREF#500  -  [unnamed]  59.03 14.86 270 top
NOREF#501  -  [unnamed]  94.77 37.06 180 top
NOREF#502  -  [unnamed]  67.92 55.55 270 top
NOREF#503  -  [unnamed]  45.49 93.17 270 top
NOREF#504  -  [unnamed]  67.59 85.7 90 top
NOREF#505  -  [unnamed]  78 37.06 180 top
NOREF#506  -  [unnamed]  87.27 37.06 180 top
NOREF#507  -  [unnamed]  82.45 37.06 180 top
NOREF#508  -  [unnamed]  18.64 89.81 180 top
NOREF#509  -  [unnamed]  45.9 6.32 90 top
NOREF#510  -  [unnamed]  59.03 20.02 270 top
NOREF#511  -  [unnamed]  82.45 57.23 0 top
NOREF#512  -  [unnamed]  93.24 77.67 0 top
NOREF#513  -  [unnamed]  67.92 55.8 270 top
NOREF#514  -  [unnamed]  96.29 77.67 0 top
NOREF#515  -  [unnamed]  39.62 89.76 180 top
NOREF#516  -  [unnamed]  84.48 77.67 0 top
NOREF#517  -  [unnamed]  36.63 89.81 180 top
NOREF#518  -  [unnamed]  67.92 57.84 270 top
NOREF#519  -  [unnamed]  67.92 60.63 270 top
NOREF#520  -  [unnamed]  71.32 77.67 0 top
NOREF#521  -  [unnamed]  75.08 57.23 0 top
NOREF#522  -  [unnamed]  74.32 57.23 0 top
NOREF#523  -  [unnamed]  45.9 15.49 90 top
NOREF#524  -  [unnamed]  67.92 51.1 270 top
NOREF#525  -  [unnamed]  75.97 37.06 180 top
NOREF#526  -  [unnamed]  73.69 57.23 0 top
NOREF#527  -  [unnamed]  87.53 77.67 0 top
NOREF#528  -  [unnamed]  59.03 22.56 270 top
NOREF#529  -  [unnamed]  64.67 37.06 180 top
NOREF#530  -  [unnamed]  11.18 89.81 180 top
NOREF#531  -  [unnamed]  61.57 33.88 270 top
NOREF#532  -  [unnamed]  67.92 60.81 270 top
NOREF#533  -  [unnamed]  45.9 17.53 90 top
NOREF#534  -  [unnamed]  19.15 89.81 180 top
NOREF#535  -  [unnamed]  67.59 88.01 90 top
NOREF#536  -  [unnamed]  45.49 97.49 270 top
NOREF#537  -  [unnamed]  68.48 37.06 180 top
NOREF#538  -  [unnamed]  78 57.23 0 top
NOREF#539  -  [unnamed]  59.03 12.57 270 top
NOREF#540  -  [unnamed]  59.03 22.3 270 top
NOREF#541  -  [unnamed]  59.03 21.03 270 top
NOREF#542  -  [unnamed]  61.57 30.58 270 top
NOREF#543  -  [unnamed]  59.03 13.59 270 top
NOREF#544  -  [unnamed]  44.96 89.76 180 top
NOREF#545  -  [unnamed]  84.23 57.23 0 top
NOREF#546  -  [unnamed]  94.51 57.23 0 top
NOREF#547  -  [unnamed]  67.92 56.31 270 top
NOREF#548  -  [unnamed]  45.9 9.88 90 top
NOREF#549  -  [unnamed]  59.03 16.89 270 top
NOREF#550  -  [unnamed]  9.02 95.05 270 top
NOREF#551  -  [unnamed]  67.59 84.68 90 top
NOREF#552  -  [unnamed]  59.03 18.49 270 top
NOREF#553  -  [unnamed]  65.18 37.06 180 top
NOREF#554  -  [unnamed]  74.57 57.23 0 top
NOREF#555  -  [unnamed]  45.9 4.55 90 top
NOREF#556  -  [unnamed]  36.88 89.81 180 top
NOREF#557  -  [unnamed]  9.02 97.84 270 top
NOREF#558  -  [unnamed#2]  96.52 92.71 0 top
NOREF#559  -  [unnamed]  67.59 87.25 90 top
NOREF#560  -  [unnamed]  45.49 91.9 270 top
NOREF#561  -  [unnamed]  67.59 93.01 90 top
NOREF#562  -  [unnamed]  77.24 77.67 0 top
NOREF#563  -  [unnamed]  9.02 94.03 270 top
NOREF#564  -  [unnamed]  10.16 89.81 180 top
NOREF#565  -  [unnamed]  40.64 89.76 180 top
NOREF#566  -  [unnamed]  79.53 77.67 0 top
NOREF#567  -  [unnamed]  67.92 55.3 270 top
NOREF#568  -  [unnamed]  74.96 57.23 0 top
NOREF#569  -  [unnamed]  12.45 89.81 180 top
NOREF#570  -  [unnamed]  9.02 92.76 270 top
NOREF#571  -  [unnamed]  65.43 37.06 180 top
NOREF#572  -  [unnamed]  61.57 33.12 270 top
NOREF#573  -  [unnamed]  87.02 77.67 0 top
NOREF#574  -  [unnamed]  45.49 96.47 270 top
NOREF#575  -  [unnamed]  40.89 89.76 180 top
NOREF#576  -  [unnamed]  59.03 16.13 270 top
NOREF#577  -  [unnamed]  67.92 51.61 270 top
NOREF#578  -  [unnamed]  43.18 89.76 180 top
NOREF#579  -  [unnamed]  61.57 29.57 270 top
NOREF#580  -  [unnamed]  67.92 57.58 270 top
NOREF#581  -  [unnamed]  71.27 57.23 0 top
NOREF#582  -  [unnamed]  67.92 59.87 270 top
NOREF#583  -  [unnamed]  17.63 89.81 180 top
NOREF#584  -  [unnamed]  24.33 89.81 180 top
NOREF#585  -  [unnamed]  8.89 89.81 180 top
NOREF#586  -  [unnamed]  91.72 37.06 180 top
NOREF#587  -  [unnamed]  72.85 77.67 0 top
NOREF#588  -  [unnamed]  45.9 6.07 90 top
NOREF#589  -  [unnamed]  41.4 89.76 180 top
NOREF#590  -  [unnamed]  32.31 89.81 180 top
NOREF#591  -  [unnamed]  45.9 8.86 90 top
NOREF#592  -  [unnamed]  11.68 89.81 180 top
NOREF#593  -  [unnamed]  73.86 77.67 0 top
NOREF#594  -  [unnamed]  68.99 37.06 180 top
NOREF#595  -  [unnamed]  67.59 76.94 90 top
NOREF#596  -  [unnamed]  67.59 84.43 90 top
NOREF#597  -  [unnamed]  67.92 46.28 270 top
NOREF#598  -  [unnamed]  78 77.67 0 top
NOREF#599  -  [unnamed]  73.81 57.23 0 top
NOREF#600  -  [unnamed]  74.19 37.06 180 top
NOREF#601  -  [unnamed]  94.77 77.67 0 top
NOREF#602  -  [unnamed]  94.26 37.06 180 top
NOREF#603  -  [unnamed]  93.75 57.23 0 top
NOREF#604  -  [unnamed]  67.92 57.25 270 top
NOREF#605  -  [unnamed]  59.03 17.48 270 top
NOREF#606  -  [unnamed]  74.19 57.23 0 top
NOREF#607  -  [unnamed]  29.41 89.81 180 top
NOREF#608  -  [unnamed]  76.1 57.23 0 top
NOREF#609  -  [unnamed]  92.74 57.23 0 top
NOREF#610  -  [unnamed]  45.49 92.66 270 top
NOREF#611  -  [unnamed]  74.96 37.06 180 top
NOREF#612  -  [unnamed]  67.59 88.77 90 top
NOREF#613  -  [unnamed]  85.5 37.06 180 top
NOREF#614  -  [unnamed]  59.03 23.06 270 top
NOREF#615  -  [unnamed]  45.9 17.78 90 top
NOREF#616  -  [unnamed]  84.73 77.67 0 top
NOREF#617  -  [unnamed]  67.59 86.97 90 top
NOREF#618  -  [unnamed]  45.9 19.56 90 top
NOREF#619  -  [unnamed]  14.22 89.81 180 top
NOREF#620  -  [unnamed]  95.78 57.23 0 top
NOREF#621  -  [unnamed]  67.92 55.98 270 top
NOREF#622  -  [unnamed]  16.87 89.81 180 top
NOREF#623  -  [unnamed]  90.96 37.06 180 top
NOREF#624  -  [unnamed]  94.26 57.23 0 top
NOREF#625  -  [unnamed]  42.16 89.76 180 top
NOREF#626  -  [unnamed]  66.19 37.06 180 top
NOREF#627  -  [unnamed]  45.9 18.54 90 top
NOREF#628  -  [unnamed]  33.58 89.81 180 top
NOREF#629  -  [unnamed]  67.59 75.41 90 top
NOREF#630  -  [unnamed]  10.92 89.81 180 top
NOREF#631  -  [unnamed]  87.27 77.67 0 top
NOREF#632  -  [unnamed]  96.04 57.23 0 top
NOREF#633  -  [unnamed]  85.75 37.06 180 top
NOREF#634  -  [unnamed]  83.21 37.06 180 top
NOREF#635  -  [unnamed]  29.92 89.81 180 top
NOREF#636  -  [unnamed]  67.92 59.03 270 top
NOREF#637  -  [unnamed]  59.03 15.11 270 top
NOREF#638  -  [unnamed]  75.72 57.23 0 top
NOREF#639  -  [unnamed]  67.59 78.71 90 top
NOREF#640  -  [unnamed]  59.03 20.78 270 top
NOREF#641  -  [unnamed]  81.18 37.06 180 top
NOREF#642  -  [unnamed]  61.57 28.04 270 top
NOREF#643  -  [unnamed]  76.73 57.23 0 top
NOREF#644  -  [unnamed]  67.59 83.67 90 top
NOREF#645  -  [unnamed]  39.88 89.76 180 top
NOREF#646  -  [unnamed]  75.59 57.23 0 top
NOREF#647  -  [unnamed]  83.97 57.23 0 top
NOREF#648  -  [unnamed]  67.92 61.06 270 top
NOREF#649  -  [unnamed]  14.48 89.81 180 top
NOREF#650  -  [unnamed]  34.59 89.81 180 top
NOREF#651  -  [unnamed]  59.03 21.79 270 top
NOREF#652  -  [unnamed]  45.9 16.51 90 top
NOREF#653  -  [unnamed]  59.03 12.06 270 top
NOREF#654  -  [unnamed]  13.72 89.81 180 top
NOREF#655  -  [unnamed]  45.9 5.82 90 top
NOREF#656  -  [unnamed]  27.64 89.81 180 top
NOREF#657  -  [unnamed]  67.59 87.5 90 top
NOREF#658  -  [unnamed]  74.19 77.67 0 top
NOREF#659  -  [unnamed]  95.78 77.67 0 top
NOREF#660  -  [unnamed]  45.9 5.31 90 top
NOREF#661  -  [unnamed]  67.92 59.36 270 top
NOREF#662  -  [unnamed]  67.59 94.03 90 top
NOREF#663  -  [unnamed]  59.03 22.81 270 top
NOREF#664  -  [unnamed]  63.91 37.06 180 top
NOREF#665  -  [unnamed]  96.29 57.23 0 top
NOREF#666  -  [unnamed]  67.92 60.05 270 top
NOREF#667  -  [unnamed]  67.59 93.27 90 top
NOREF#668  -  [unnamed]  61.57 28.55 270 top
NOREF#669  -  [unnamed]  59.03 17.73 270 top
NOREF#670  -  [unnamed]  92.48 37.06 180 top
NOREF#671  -  [unnamed]  73.69 37.06 180 top
NOREF#672  -  [unnamed]  75.97 57.23 0 top
NOREF#673  -  [unnamed]  87.53 37.06 180 top
NOREF#674  -  [unnamed]  76.23 37.06 180 top
NOREF#675  -  [unnamed]  67.92 58.34 270 top
NOREF#676  -  [unnamed]  91.47 37.06 180 top
NOREF#677  -  [unnamed]  83.46 37.06 180 top
NOREF#678  -  [unnamed]  20.93 89.81 180 top
NOREF#679  -  [unnamed]  45.49 93.68 270 top
NOREF#680  -  [unnamed]  9.02 92.51 270 top
NOREF#681  -  [unnamed]  32.56 89.81 180 top
NOREF#682  -  [unnamed]  67.92 50.6 270 top
NOREF#683  -  [unnamed]  45.49 94.44 270 top
NOREF#684  -  [unnamed]  95.53 57.23 0 top
NOREF#685  -  [unnamed]  91.72 77.67 0 top
NOREF#686  -  [unnamed]  69.8 77.67 0 top
NOREF#687  -  [unnamed]  59.03 14.1 270 top
NOREF#688  -  [unnamed]  67.59 94.28 90 top
NOREF#689  -  [unnamed]  9.02 93.78 270 top
NOREF#690  -  [unnamed]  61.57 29.06 270 top
NOREF#691  -  [unnamed]  67.92 57.76 270 top
NOREF#692  -  [unnamed]  45.9 17.27 90 top
NOREF#693  -  [unnamed]  93.24 57.23 0 top
NOREF#694  -  [unnamed]  9.02 98.09 270 top
NOREF#695  -  [unnamed]  72.67 37.06 180 top
NOREF#696  -  [unnamed]  38.4 89.81 180 top
NOREF#697  -  [unnamed]  9.02 94.54 270 top
NOREF#698  -  [unnamed]  86.77 37.06 180 top
NOREF#699  -  [unnamed]  45.49 91.64 270 top
NOREF#700  -  [unnamed]  94.51 37.06 180 top
NOREF#701  -  [unnamed]  44.45 89.76 180 top
NOREF#702  -  [unnamed]  67.59 78.21 90 top
NOREF#703  -  [unnamed]  67.59 95.05 90 top
NOREF#704  -  [unnamed]  29.16 89.81 180 top
NOREF#705  -  [unnamed]  70.82 77.67 0 top
NOREF#706  -  [unnamed]  67.59 84.94 90 top
NOREF#707  -  [unnamed]  45.49 95.71 270 top
NOREF#708  -  [unnamed]  83.21 57.23 0 top
NOREF#709  -  [unnamed]  9.02 93.27 270 top
NOREF#710  -  [unnamed]  59.03 11.3 270 top
NOREF#711  -  [unnamed]  45.9 10.13 90 top
NOREF#712  -  [unnamed]  96.04 37.06 180 top
NOREF#713  -  [unnamed]  76.23 57.23 0 top
NOREF#714  -  [unnamed]  67.59 76.68 90 top
NOREF#715  -  [unnamed]  9.02 97.59 270 top
NOREF#716  -  [unnamed]  91.21 37.06 180 top
NOREF#717  -  [unnamed]  67.59 77.7 90 top
NOREF#718  -  [unnamed]  45.9 18.8 90 top
NOREF#719  -  [unnamed]  45.9 18.29 90 top
NOREF#720  -  [unnamed]  45.49 95.2 270 top
NOREF#721  -  [unnamed]  59.03 21.29 270 top
NOREF#722  -  [unnamed]  64.41 37.06 180 top
NOREF#723  -  [unnamed]  30.18 89.81 180 top
NOREF#724  -  [unnamed]  73.36 77.67 0 top
OSC32_IN  TESTPONT-S  [TESTSMD]  21.59 44.7 90 top
OSC32_OUT  TESTPONT-S  [TESTSMD]  22.35 42.67 90 top
POWER_LED  POWER_LED  [HEADER2]  57.66 43.81 180 top
Q700  TCS1307  [SOT23]  57.1 57.63 0 top
Q701  3904  [SOT23]  59.41 61.95 0 top
Q702  3904  [SOT23]  59.54 66.47 90 top
R100  1K  [R0603]  37.85 45.47 270 top
R101  1K  [R0603]  39.37 45.47 270 top
R102  10K  [R0603]  37.87 41.33 270 top
R103  10K  [R0603]  52.07 52.07 270 top
R104  10K  [R0603]  52.07 55.24 90 top
R105  10K  [R0603]  13.21 49.53 180 top
R106  20K  [R0603]  13.21 48.01 0 top
R107  10K  [R0603]  41.27 59.69 180 top
R200  56k  [R0603]  88.6 49.3 180 top
R201  3.3K  [R0603]  73.03 54.61 270 top
R202  4.7k  [R0603]  85.09 39.37 180 top
R203  3.3K  [R0603]  73.03 51.44 180 top
R300  56k  [R0603]  88.6 69.47 180 top
R301  2.4K  [R0603]  71.75 74.93 270 top
R302  4.7k  [R0603]  85.09 59.69 180 top
R303  3.3K  [R0603]  73.03 71.75 180 top
R400  56k  [R0603]  87.33 89.36 180 top
R401  2.4K  [R0603]  71.12 93.34 270 top
R402  4.7k  [R0603]  83.82 79.38 180 top
R403  3.3K  [R0603]  71.75 90.17 180 top
R700  51K  [R0603]  55.83 61.11 0 top
R701  51K  [R0603]  63.3 66.47 180 top
R702  1K  [R0603]  62.48 64.06 270 top
R703  51K  [R0603]  55.3 64.21 90 top
R704  1K  [R0603]  55.93 67.28 0 top
R705  51K  [R0603]  53.34 73.03 270 top
R800  1K  [R0603]  21.01 87.48 270 top
R801  1K  [R0603]  18.47 87.48 270 top
R802  1K  [R0603]  15.93 87.48 270 top
R803  1K  [R0603]  13.39 87.48 270 top
R804  1K  [R0603]  10.85 87.48 270 top
R805  1K  [R0603]  8.31 87.48 270 top
R806  1K  [R0603]  5.77 87.48 270 top
R807  1K  [R0603]  3.23 87.48 270 top
R808  10K  [R0603]  3.17 70.94 270 top
R809  10K  [R0603]  5.71 70.94 270 top
R810  10K  [R0603]  8.26 70.94 270 top
R811  10K  [R0603]  10.79 70.94 270 top
R812  10K  [R0603]  13.34 70.94 270 top
R813  10K  [R0603]  15.88 70.94 270 top
R814  10K  [R0603]  18.41 70.94 270 top
R815  10K  [R0603]  20.95 70.94 270 top
R816  1K  [R0603]  43.74 87.48 270 top
R817  1K  [R0603]  41.2 87.48 270 top
R818  1K  [R0603]  38.66 87.48 270 top
R819  1K  [R0603]  36.12 87.48 270 top
R820  1K  [R0603]  33.58 87.48 270 top
R821  1K  [R0603]  31.04 87.48 270 top
R822  1K  [R0603]  28.5 87.48 270 top
R823  1K  [R0603]  25.96 87.48 270 top
R824  10K  [R0603]  26.01 70.94 270 top
R825  10K  [R0603]  28.55 70.94 270 top
R826  10K  [R0603]  31.09 70.94 270 top
R827  10K  [R0603]  33.63 70.94 270 top
R828  10K  [R0603]  36.17 70.94 270 top
R829  10K  [R0603]  38.71 70.94 270 top
R830  10K  [R0603]  41.25 70.94 270 top
R831  10K  [R0603]  43.79 70.94 270 top
R900  10K  [R0603]  55.96 87.27 180 top
R901  1K  [R0603]  53.52 86.54 90 top
R902  1K  [R0603]  51.51 86.54 90 top
R1000  30K  [R0603]  19.81 38.02 180 top
R1001  10K  [R0603]  16.71 38.02 0 top
R1002  10K  [R0603]  89.53 6.99 90 top
R1003  3.3K  [R0603]  86.36 7.62 180 top
R1004  3.3K  [R0603]  62.1 41.27 90 top
RF1_LED  RF1_LED  [HEADER2]  72.39 46.99 270 top
RF2_LED  RF2_LED  [HEADER2]  71.75 67.31 270 top
RF3_LED  RF3_LED  [HEADER2]  71.12 85.72 270 top
SW100  SW  [HEADER3]  48.26 55.88 90 top
SWD  SWD  [HEADER4]  16.97 56.92 90 top
U100  STM32F103VCT6  [LQFP100]  29.39 58.83 90 top
U200  CC253X  [VQFN40]  81.92 45.29 0 top
U300  CC253X  [VQFN40]  81.92 66.53 0 top
U400  CC253X  [VQFN40]  80.64 85.72 0 top
U500  LM1117-33  [SOT-223]  53.77 11.91 180 top
U501  TCS2163-3.3V  [SOT23]  48.29 9.65 180 top
U502  -  [WIFI_BJ]  79.38 23.5 0 top
U900  TPM  [SOP8]  51.26 92.89 270 top
U901  3.579MHZ  [CRYSTAL-5X7]  61.62 87.63 90 top
U1000  POWER_AC_TO_DC  [ACDC_MODEL]  27.94 11.43 0 top
U1002  TT7624A/SOP8  [SOP8]  13.51 30.28 0 top
U1003  LM1117-33  [SOT-223]  52.15 32.38 270 top
U1004  TCS2163-3.3V  [SOT23]  55.55 26.64 270 top
UART100  HEADER4  [HEADER5]  12.7 64.14 270 top
WIFI_LED  WIFI_LED  [HEADER2]  80.01 6.35 180 top
Y100  8M  [9-216M]  32.08 45.36 180 top
Y200  32MHz  [CY_3D2X2D5]  89.23 41.5 180 top
Y300  32MHz  [CY_3D2X2D5]  89.53 62.23 180 top
Y400  32MHz  [CY_3D2X2D5]  88.06 81.97 180 top

## Library data of the parts
AC_220V = HEADER3
ANT201 ANT301 ANT401 = IPX
BM200 BM300 BM400 = 2450BM_0
C100-C109 = CAP NP_4
C200 C300 C400 C1005 = CAP_1
C202-C205 C301 C303-C305 C401-C404 C1002 = C_0
C208 C308 C408 = CAP NP_1
C209 C309 C409 = CAP NP
C500 = CAP_0.1uF_0603
C501 C1003 C1004 = CAP_1.1uF_0603
C1000 C1001 = CAPACITOR POL_0
D900 D901 D1000 = DIODE
D1001 D1002 LED200 LED300 LED400 = LED
DC_12V = HEADER_4
DOWN200 DOWN300 DOWN400 = CY7C68013A-100_6
H600 H700 H701 POWER_LED RF1_LED RF2_LED RF3_LED WIFI_LED = HEADER
H601 = LED_0
H900 LED100 = HEADER_1
ID800 ID801 = SW_0
J600 = JUMP
J601 J602 = FPC_0
J603-J614 = TESTPONT-L
L1000 = INDUCTOR_0
OSC32_IN OSC32_OUT = TESTPONT-S
Q700 = FDC634P_4
Q701 Q702 = NPN_0
R100-R107 R201 R203 R301 R303 R401 R403 R700-R705 R1000 R1001 = RESISTOR_0
R200 R202 R300 R302 R400 R402 = R_0
R800-R831 R900-R902 R1002-R1004 = RES
SW100 = HEADER_3
SWD = HEADER5_0
U100 = GL811USB _0
U200 U300 U400 = CC253X_0
U500 U1003 = CY7C68013A-100_1
U501 U901 U1004 = CY7C68013A-100_0
U502 = WIFI-BJ_0
U900 = TPM
U1000 = POWER_AC_TO_DC_1
U1002 = CY7C68013A-100_16
UART100 = HEADER 5_0
Y100 = CRYSTAL_2
Y200 Y300 Y400 = CSTCW-2_0x2_0

## Footprints (pads in the part's own frame, mm; a bottom-side part is the same pattern mirrored in y, then rotated)
1N4148
  rect 1.626x1.6 smd: 1(-0.025,-3.505) 2(0.025,0.406)
9-216M
  round 1.372 hole 0.889: 1(0,0) 2(5.08,0)
2450BM
  rect 0.356x1.016 smd: 1(0.65,0.902) 2(0,0.902) 3(-0.65,0.902) 4(-0.65,-0.899) 5(0,-0.899) 6(0.65,-0.899)
ACDC_MODEL
  rect 2.032x2.032 hole 1.27: 1(-13.335,7.62)
  round 2.032 hole 1.27: 2(-13.335,2.54) 3(13.335,-7.62) 4(13.335,-2.54) 5(13.335,2.54)
B130L
  rect 2.286x2.54 smd: 1(2.286,0) 2(-2.286,0)
C0603
  rect 0.965x1.016 smd: 1(-0.914,0) 2(0.914,0)
C1206
  rect 1.626x1.6 smd: 1(0,1.714) 2(0,-1.714)
CAP-B
  rect 2.489x2.997 smd: 1(1.912,0.004) 2(-1.83,0.01)
CAPAE660X570L
  rect 3.556x1.524 smd: 1(-3,0) 2(3,0)
CDRH4D18
  rect 5.283x1.905 smd: 1(0,2.032) 2(0,-2.032)
CRYSTAL-5X7
  rect 1.702x1.397 smd: 1(-2.54,-2.54) 2(2.54,-2.54) 3(2.54,2.54) 4(-2.54,2.54)
CY_3D2X2D5
  rect 1.524x1.016 smd: 1(-0.8,-0.749) 2(1.1,-0.749) 3(1.1,0.65) 4(-0.8,0.65)
FH12A-54S-0_5FCC
  rect 0.279x1.524 smd: 1(0,2.301) 2(0.5,2.301) 3(1.001,2.301) 4(1.501,2.301) 5(1.999,2.301) 6(2.499,2.301) 7(3,2.301) 8(3.5,2.301) 9(4,2.301) 10(4.501,2.301) 11(5.001,2.301) 12(5.499,2.301) 13(5.999,2.301) 14(6.5,2.301) 15(7,2.301) 16(7.501,2.301) 17(8.001,2.301) 18(8.499,2.301) 19(8.999,2.301) 20(9.5,2.301) 21(10,2.301) 22(10.5,2.301) 23(11.001,2.301) 24(11.501,2.301) 25(11.999,2.301) 26(12.499,2.301) 27(13,2.301) 28(13.5,2.301) 29(14,2.301) 30(14.501,2.301) 31(15.001,2.301) 32(15.499,2.301) 33(15.999,2.301) 34(16.5,2.301) 35(17,2.301) 36(17.501,2.301) 37(18.001,2.301) 38(18.501,2.301) 39(18.999,2.301) 40(19.5,2.301) 41(20,2.301) 42(20.5,2.301) 43(21.001,2.301) 44(21.501,2.301) 45(21.999,2.301) 46(22.499,2.301) 47(23,2.301) 48(23.5,2.301) 49(24,2.301) 50(24.501,2.301) 51(25.001,2.301) 52(25.499,2.301) 53(25.999,2.301) 54(26.5,2.301)
  rect 2.54x3.048 smd: 55(29.5,0) 56(-2.499,0)
HEADER2
  rect 1.524x1.524 hole 0.889: 1(0,0)
  round 1.524 hole 0.889: 2(2.54,0)
HEADER2-300MIL
  round 3.048 hole 1.651: 1(0,3.81) 2(0,-3.81)
HEADER3
  rect 1.524x1.524 hole 0.889: 1(-3.81,0)
  round 1.524 hole 0.889: 2(-1.27,0) 3(1.27,0)
HEADER3-150MIL
  round 3.048 hole 1.651: 1(0,3.81) 2(0,0) 3(0,-3.81)
HEADER4
  rect 1.524x1.524 hole 0.889: 1(0,0)
  round 1.524 hole 0.889: 2(2.54,0) 3(5.08,0) 4(7.62,0)
HEADER5
  rect 1.524x1.524 hole 0.889: 1(0,0)
  round 1.524 hole 0.889: 2(2.54,0) 3(5.08,0) 4(7.62,0) 5(10.16,0)
HEADER8X2
  rect 1.524x1.524 hole 0.94: 1(0,0)
  round 1.524 hole 0.94: 2(0,2.54) 3(2.54,0) 4(2.54,2.54) 5(5.08,0) 6(5.08,2.54) 7(7.62,0) 8(7.62,2.54) 9(10.16,0) 10(10.16,2.54) 11(12.7,0) 12(12.7,2.54) 13(15.24,0) 14(15.24,2.54) 15(17.78,0) 16(17.78,2.54)
HEADER10
  rect 1.524x1.524 hole 0.914: 1(0,0)
  round 1.524 hole 0.94: 2(0,2.54) 3(2.54,0) 4(2.54,2.54) 5(5.08,0) 6(5.08,2.54) 7(7.62,0) 8(7.62,2.54) 9(10.16,0) 10(10.16,2.54)
IPX
  rect 1.016x1.524 smd: 1(0,-1.43)
  rect 1.016x2.54 smd: 2(-1.45,-3.081) 3(1.45,-3.081)
LED0603
  rect 0.838x0.838 smd: 1(0,-0.8) 2(0,0.8)
LED_SMD
  rect 1.194x1.092 smd: 1(0,-2.108) 2(0,-0.152)
LQFP100
  rect 1.778x0.254 smd: 1(-8.001,6.002) 2(-8.001,5.502) 3(-8.001,5.001) 4(-8.001,4.501) 5(-8.001,4) 6(-8.001,3.5) 7(-8.001,3) 8(-8.001,2.502) 9(-8.001,2.002) 10(-8.001,1.501) 11(-8.001,1.001) 12(-8.001,0.5) 13(-8.001,0) 14(-8.001,-0.5) 15(-8.001,-1.001) 16(-8.001,-1.501) 17(-8.001,-2.002) 18(-8.001,-2.502) 19(-8.001,-3) 20(-8.001,-3.5) 21(-8.001,-4) 22(-8.001,-4.501) 23(-8.001,-5.001) 24(-8.001,-5.502) 25(-8.001,-6.002) 51(8.001,-6.002) 52(8.001,-5.502) 53(8.001,-5.001) 54(8.001,-4.501) 55(8.001,-4) 56(8.001,-3.5) 57(8.001,-3) 58(8.001,-2.502) 59(8.001,-2.002) 60(8.001,-1.501) 61(8.001,-1.001) 62(8.001,-0.5) 63(8.001,0) 64(8.001,0.5) 65(8.001,1.001) 66(8.001,1.501) 67(8.001,2.002) 68(8.001,2.502) 69(8.001,3) 70(8.001,3.5) 71(8.001,4) 72(8.001,4.501) 73(8.001,5.001) 74(8.001,5.502) 75(8.001,6.002)
  rect 0.254x1.778 smd: 26(-6.002,-8.001) 27(-5.502,-8.001) 28(-5.001,-8.001) 29(-4.501,-8.001) 30(-4,-8.001) 31(-3.5,-8.001) 32(-3,-8.001) 33(-2.502,-8.001) 34(-2.002,-8.001) 35(-1.501,-8.001) 36(-1.001,-8.001) 37(-0.5,-8.001) 38(0,-8.001) 39(0.5,-8.001) 40(1.001,-8.001) 41(1.501,-8.001) 42(2.002,-8.001) 43(2.502,-8.001) 44(3,-8.001) 45(3.5,-8.001) 46(4,-8.001) 47(4.501,-8.001) 48(5.001,-8.001) 49(5.502,-8.001) 50(6.002,-8.001) 76(6.002,8.001) 77(5.502,8.001) 78(5.001,8.001) 79(4.501,8.001) 80(4,8.001) 81(3.5,8.001) 82(3,8.001) 83(2.502,8.001) 84(2.002,8.001) 85(1.501,8.001) 86(1.001,8.001) 87(0.5,8.001) 88(0,8.001) 89(-0.5,8.001) 90(-1.001,8.001) 91(-1.501,8.001) 92(-2.002,8.001) 93(-2.502,8.001) 94(-3,8.001) 95(-3.5,8.001) 96(-4,8.001) 97(-4.501,8.001) 98(-5.001,8.001) 99(-5.502,8.001) 100(-6.002,8.001)
R0603
  rect 0.762x0.965 smd: 1(-0.826,0) 2(0.826,0)
SOP8
  rect 1.016x1.524 smd: 1(-0.152,-0.254) 4(3.988,-0.254) 5(3.988,5.588) 8(-0.178,5.588)
  rect 0.635x1.524 smd: 2(1.27,-0.254) 3(2.54,-0.254) 6(2.54,5.588) 7(1.27,5.588)
SOT23
  rect 1.016x1.397 smd: 1(0.965,1.168) 2(-0.94,1.168) 3(0,-1.181)
SOT-223
  rect 1.194x1.956 smd: 1(-2.337,-0.051) 2(0.076,-0.051) 3(2.311,-0.025)
  rect 3.81x1.27 smd: 4(0,6.477)
SW-8PIN
  rect 2.642x1.194 smd: 1(-4.9,8.89) 2(-4.9,6.35) 3(-4.9,3.81) 4(-4.9,1.27) 5(-4.9,-1.27) 6(-4.9,-3.81) 7(-4.9,-6.35) 8(-4.9,-8.89) 9(4.9,-8.89) 10(4.9,-6.35) 11(4.9,-3.81) 12(4.9,-1.27) 13(4.9,1.27) 14(4.9,3.81) 15(4.9,6.35) 16(4.9,8.89)
TESTSMD
  round 1.016 smd: 1(0,0)
unnamed
  round 0.762 hole 0.762 unplated: (0,0)
unnamed#2
  round 6.35 hole 3.048: 1(0,0)
VQFN40
  rect 0.864x0.279 smd: 1(-3,2.25) 2(-3,1.75) 3(-3,1.25) 4(-3,0.749) 5(-3,0.249) 6(-3,-0.249) 7(-3,-0.749) 8(-3,-1.25) 9(-3,-1.75) 10(-3,-2.25) 21(3,-2.25) 22(3,-1.75) 23(3,-1.25) 24(3,-0.749) 25(3,-0.249) 26(3,0.249) 27(3,0.749) 28(3,1.25) 29(3,1.75) 30(3,2.25)
  rect 0.279x0.864 smd: 11(-2.25,-3) 12(-1.75,-3) 13(-1.25,-3) 14(-0.749,-3) 15(-0.249,-3) 16(0.249,-3) 17(0.749,-3) 18(1.25,-3) 19(1.75,-3) 20(2.25,-3) 31(2.25,3) 32(1.75,3) 33(1.25,3) 34(0.749,3) 35(0.249,3) 36(-0.249,3) 37(-0.749,3) 38(-1.25,3) 39(-1.75,3) 40(-2.25,3)
  rect 3.099x3.048 smd: 41(0,0)
WIFI_BJ
  rect 0.864x2.286 smd: 1(10.16,11.619) 2(8.89,11.619) 3(7.62,11.619) 4(6.35,11.619) 5(5.08,11.619) 6(3.81,11.619) 7(2.54,11.619) 8(1.27,11.619) 9(0,11.619) 10(-1.27,11.619) 11(-2.54,11.619) 12(-3.81,11.619) 13(-5.08,11.619) 14(-6.35,11.619) 15(-7.62,11.619) 16(-8.89,11.619) 17(-10.16,11.619) 18(-10.16,-11.619) 19(-8.89,-11.619) 20(-7.62,-11.619) 21(-6.35,-11.619) 22(-5.08,-11.619) 23(-3.81,-11.619) 24(-2.54,-11.619) 25(-1.27,-11.619) 26(0,-11.619) 27(1.27,-11.619) 28(2.54,-11.619) 29(3.81,-11.619) 30(5.08,-11.619) 31(6.35,-11.619) 32(7.62,-11.619) 33(8.89,-11.619) 34(10.16,-11.619)
  rect 1.524x1.524 hole 0.889: 35(-13.335,-5.334)
  round 1.524 hole 0.889: 36(-13.335,-2.794) 37(-13.335,-0.254) 38(-13.335,2.286) 39(-15.875,2.286) 40(-15.875,-0.254) 41(-15.875,-2.794) 42(-15.875,-5.334)

## Nets
3.3V: SWD.4
3V3: C101.1 C102.1 C103.1 C104.1 C105.1 C106.1 C107.1 C202.2 C203.2 C204.2 C205.2 C301.2 C303.2 C304.2 C305.2 C401.2 C402.2 C403.2 C404.2 C1004.1 D900.1 DOWN200.2 DOWN300.2 DOWN400.2 LED100.2 R102.2 R103.1 R104.1 R201.2 R202.1 R203.2 R301.2 R302.1 R303.2 R401.2 R402.1 R403.2 R701.1 R703.1 R705.1 R800.1 R801.1 R802.1 R803.1 R804.1 R805.1 R806.1 R807.1 R816.1 R817.1 R818.1 R819.1 R820.1 R821.1 R822.1 R823.1 R900.1 R1004.1 U100.6(VBAT) U100.11(VDD_5) U100.21(VREF+) U100.22(VDDA) U100.28(VDD_4) U100.50(VDD_1) U100.75(VDD_2) U100.100(VDD_3) U200.10(DVDD2) U200.21(AVDD5) U200.24(AVDD3) U200.27(AVDD2) U200.28(AVDD1) U200.29(AVDD4) U200.31(AVDD6) U200.39(DVDD1) U300.10(DVDD2) U300.21(AVDD5) U300.24(AVDD3) U300.27(AVDD2) U300.28(AVDD1) U300.29(AVDD4) U300.31(AVDD6) U300.39(DVDD1) U400.10(DVDD2) U400.21(AVDD5) U400.24(AVDD3) U400.27(AVDD2) U400.28(AVDD1) U400.29(AVDD4) U400.31(AVDD6) U400.39(DVDD1) U901.4(VDD) U1003.2(OUT) U1003.4 U1004.2(OUT) UART100.1
3V3_WIFI: C501.1 R1002.1 U500.2(OUT) U500.4 U501.2(OUT) U502.9(VCC1) U502.20(VCC2) U502.42(VCC3)
5V: C500.1 C1001.1 C1002.2 C1003.1 J600.2 L1000.1 R1000.1 U500.3(IN) U501.3(IN) U1003.3(IN) U1004.3(IN)
12V: C1000.1 DC_12V.1 Q700.2(S) R700.1 U1000.3(DC_OUT) U1002.2(VIN) U1002.7(CE)
